# Altium PCB ESP32_PCB.PcbDoc
Units mm, origin at the board's own origin, x right, y up, seen from the top; angles counter-clockwise.
Board outline 25 x 40 mm, 4 copper layers (L1 (Sig), L2 (GND), L3 (GND), L4 (Sig)), stack 2.131 mm thick; 54 components, 44 nets, 207 pads, 84 vias.
Unrouted connection lines stored in the file: 2.
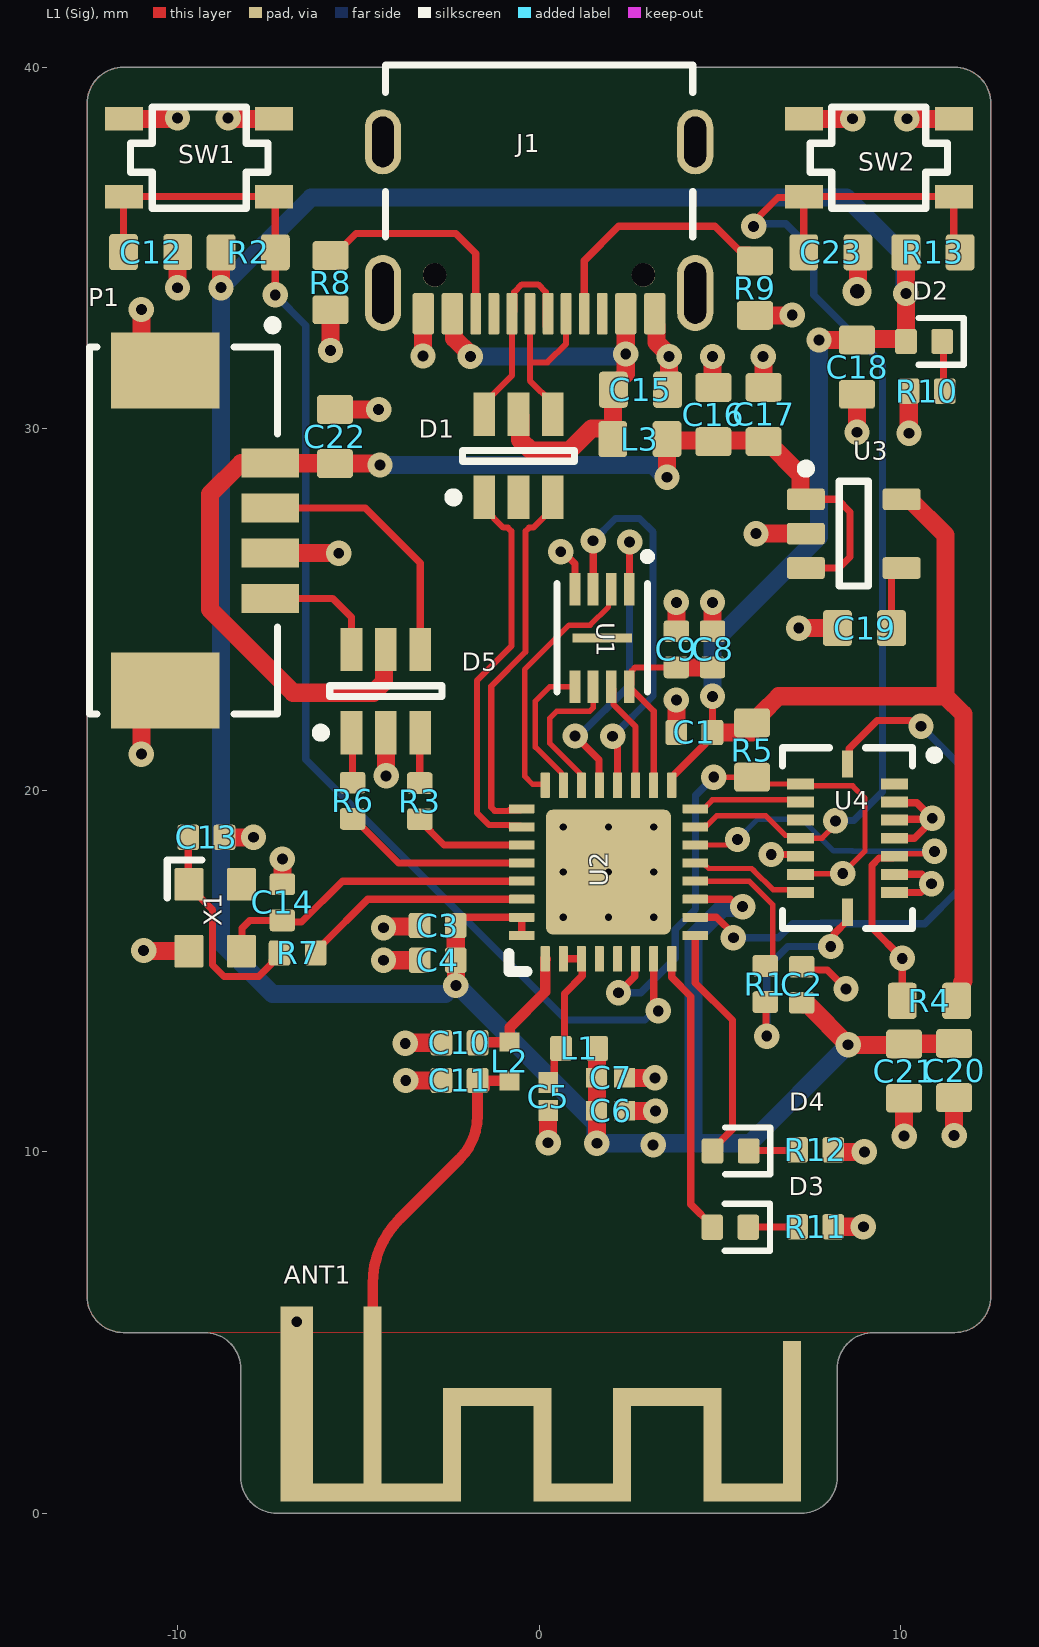
[diagram p0: L1 (Sig) view]
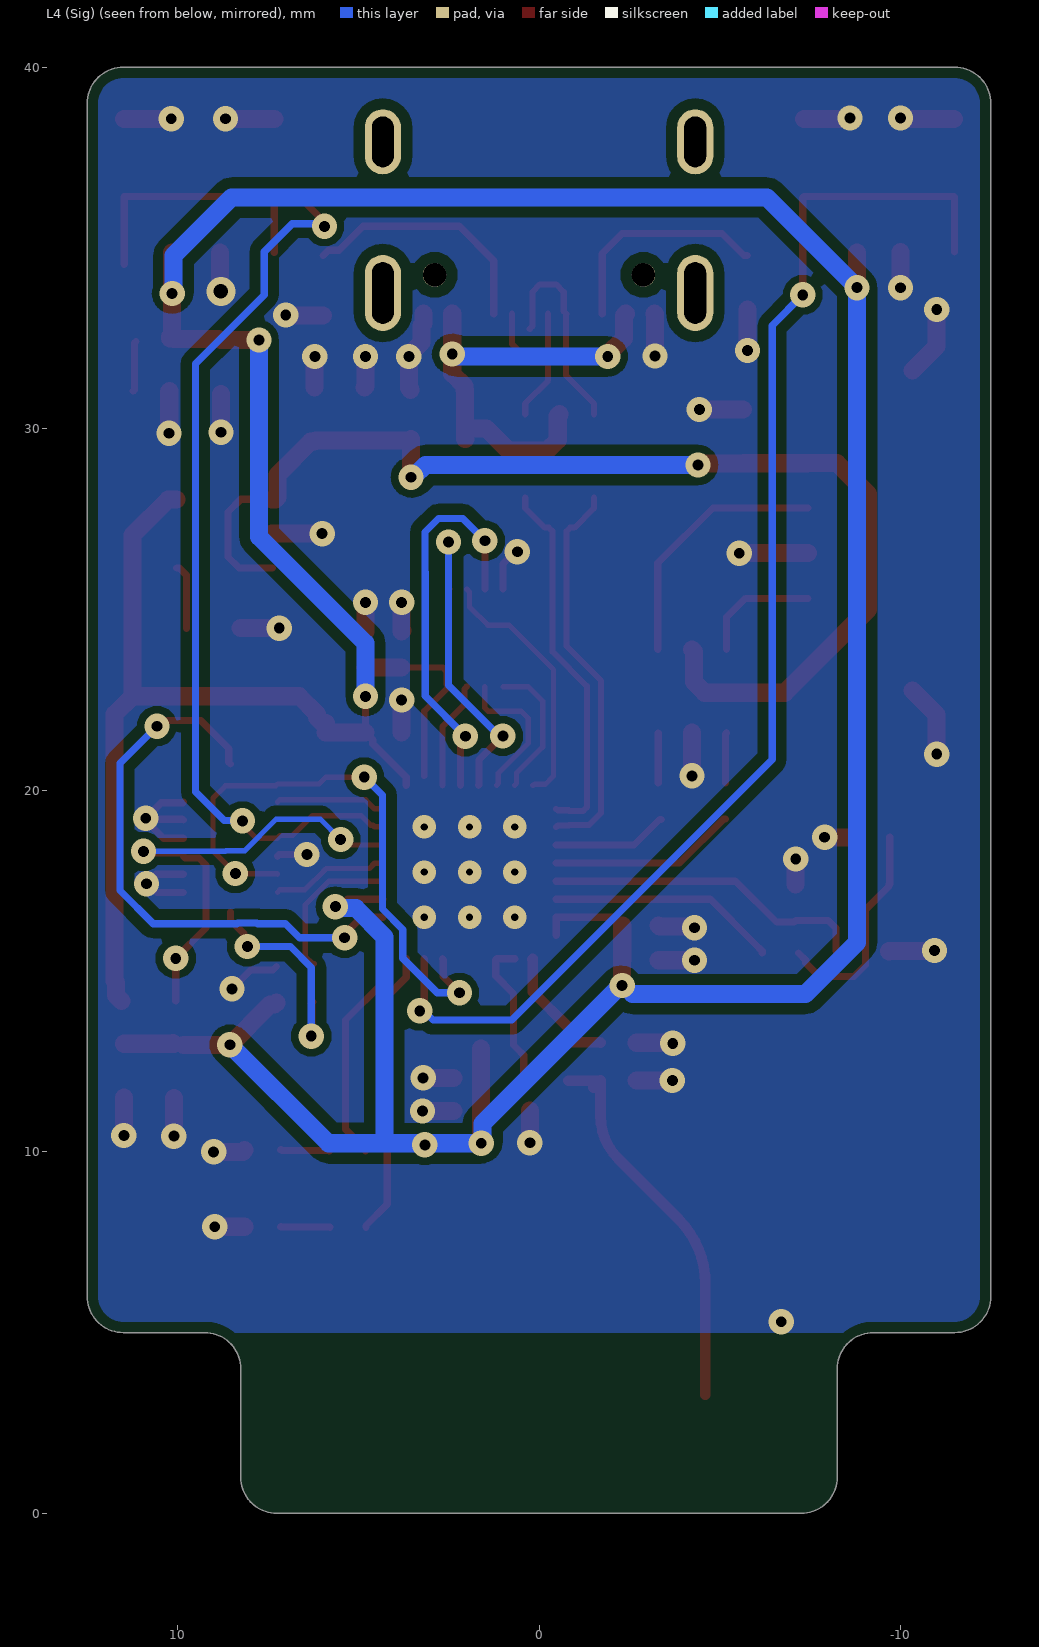
[diagram p1: L4 (Sig) view, seen from below]
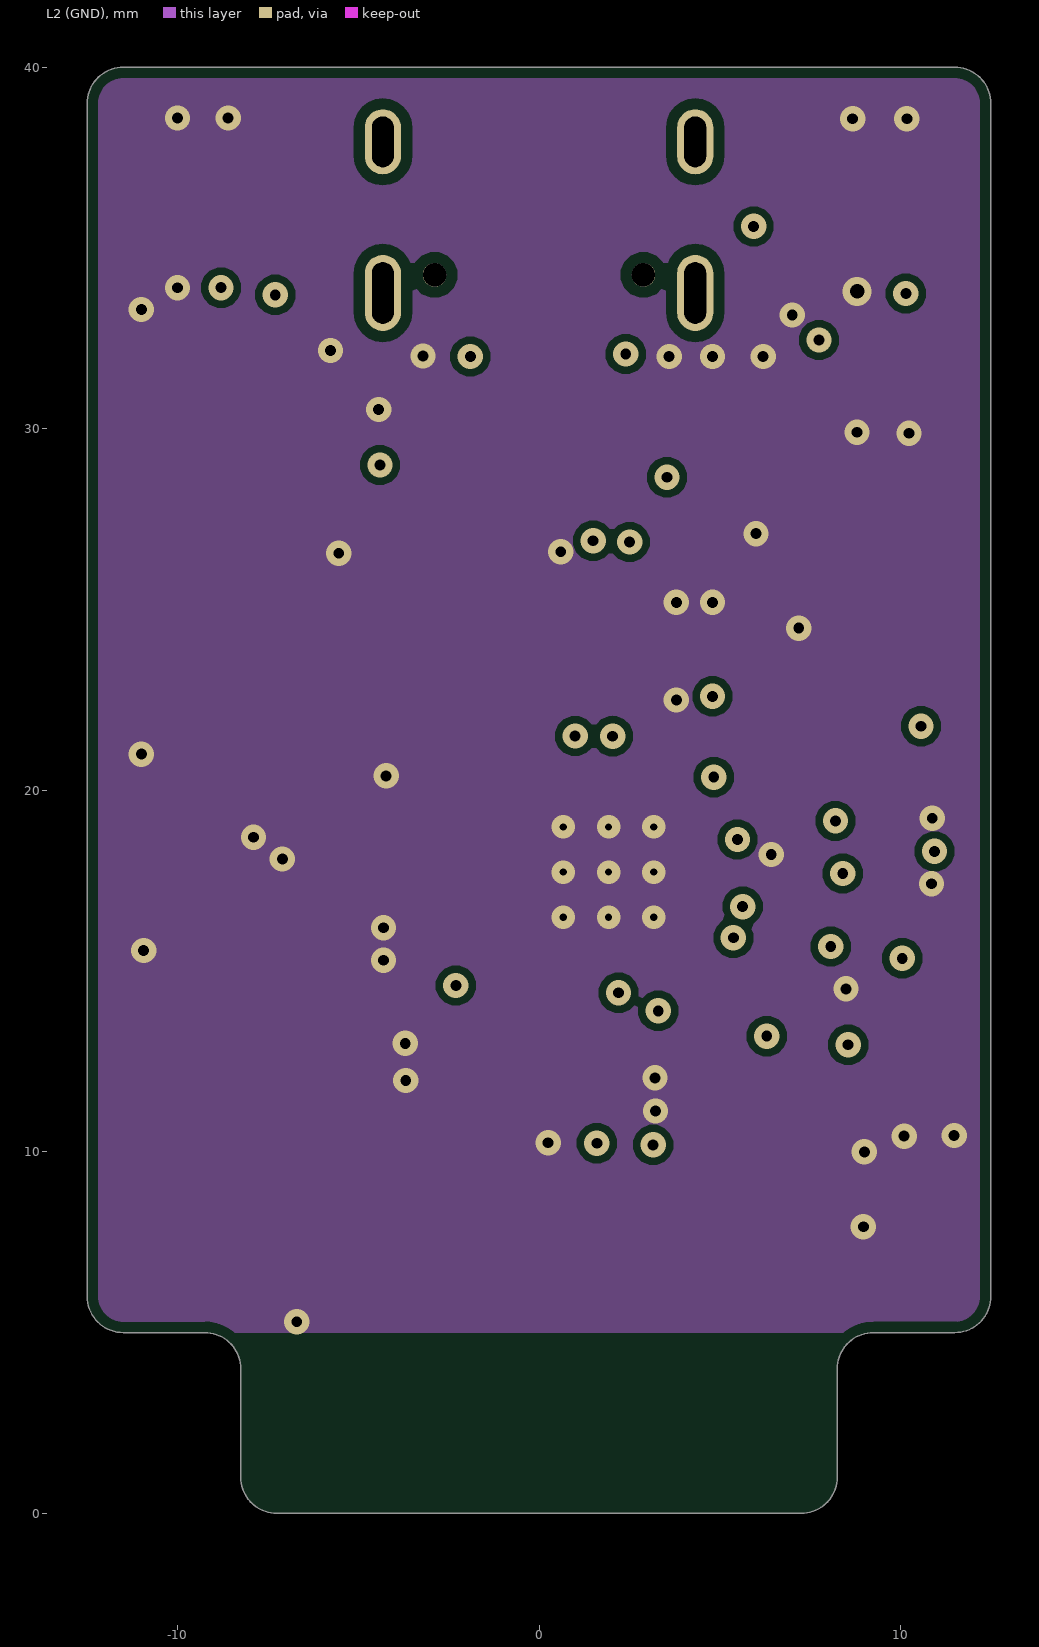
[diagram p2: L2 (GND)]
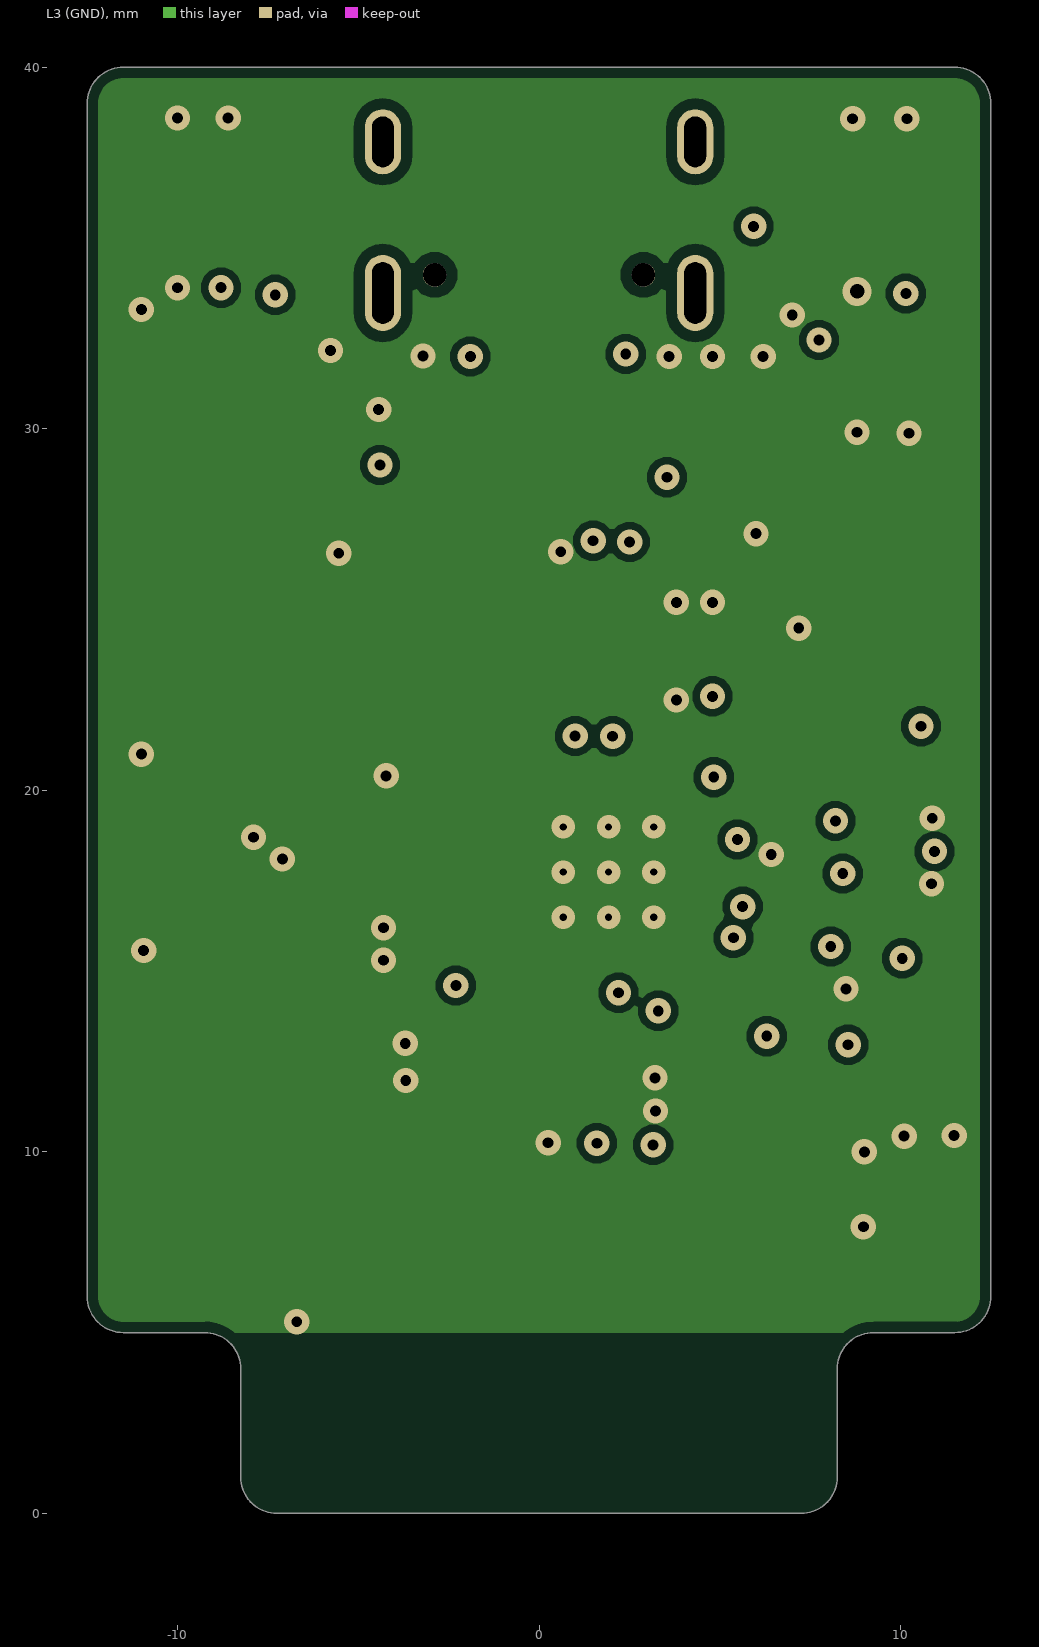
[diagram p3: L3 (GND)]
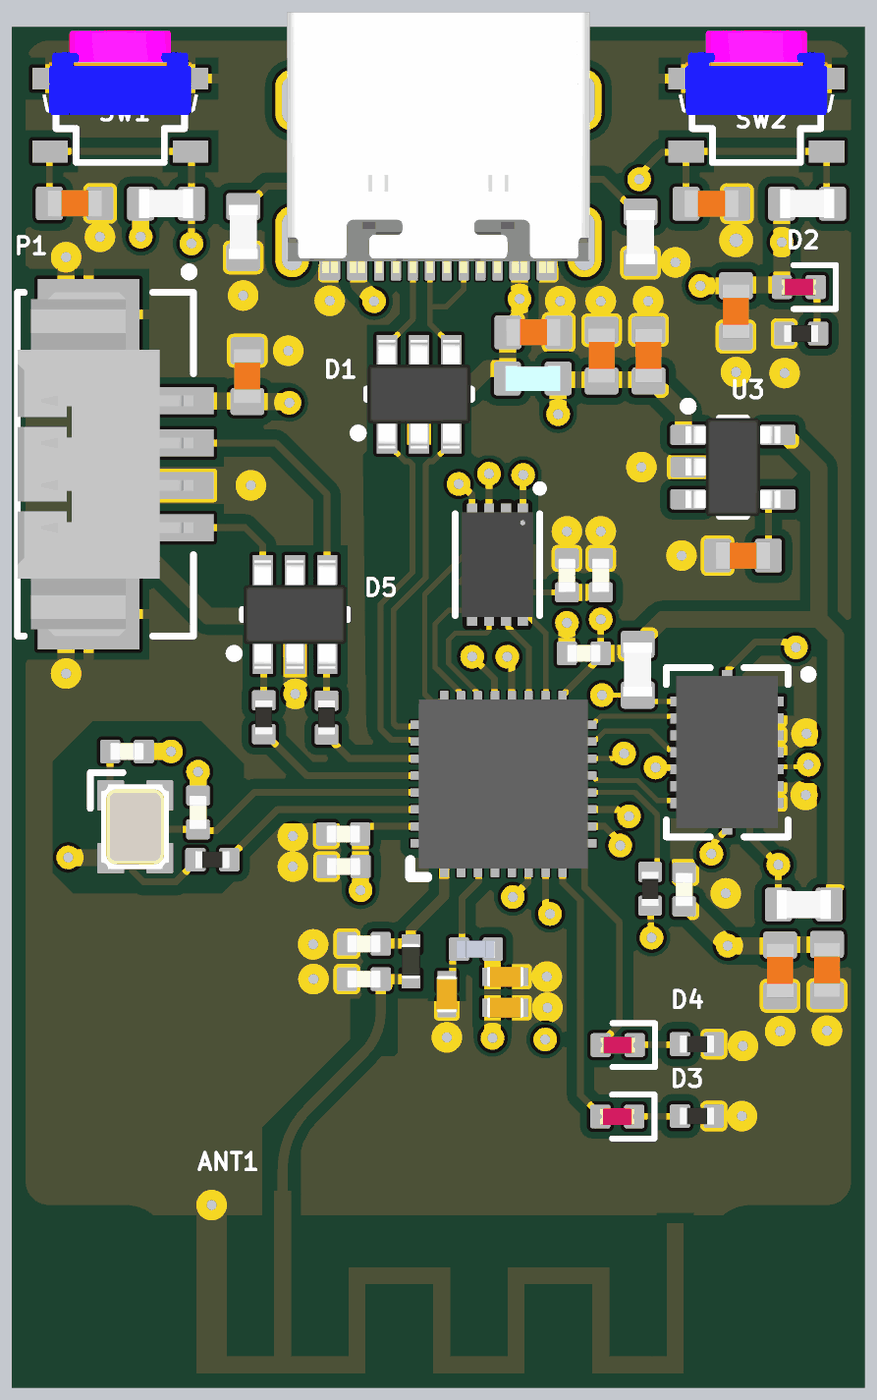
[diagram p4: 3D render of the assembled board from above, using the file's embedded part models]

## Layer stack, top to bottom
Top Solder: solder mask 0.0254, SM-001, Dk 4
L1 (Sig): signal copper 0.035
Dielectric 2: prepreg 0.2104, PP-017, Dk 4.6
L2 (GND): signal copper 0.0175
Dielectric 1: core 1.605, Core-039, Dk 4.6
L3 (GND): signal copper 0.0175
Dielectric 3: prepreg 0.2104, PP-017, Dk 4.6
L4 (Sig): signal copper 0.035
Bottom Solder: solder mask 0.0254, SM-001, Dk 4

## Board outline
-8.25,1 -8.25,4 ccw(c-9.25,4) -9.25,5 -11.5,5 cw(c-11.5,6) -12.5,6 -12.5,39 cw(c-11.5,39) -11.5,40 11.5,40 cw(c11.5,39) 12.5,39 12.5,6 cw(c11.5,6) 11.5,5 9.25,5 ccw(c9.25,4) 8.25,4 8.25,1 cw(c7.25,1) 7.25,0 -7.25,0 cw(c-7.25,1)

## Design rules (kind name [scope] priority, off if disabled: settings)
BoardOutlineClearance [All] p1: gap=0.3 ignorepadtopadclearanceinfootprint=FALSE
Clearance [All] p1: gap=0.3 ignorepadtopadclearanceinfootprint=TRUE except(0.15: Arc-Arc Arc-Track Arc-SMDPad Arc-Text Track-Track Track-SMDPad Track-Text SMDPad-SMDPad SMDPad-THPad SMDPad-Via SMDPad-Text THPad-THPad THPad-Via THPad-Text Via-Text Fill-Text Poly-Text Region-Text Text-Text; 0.2: Arc-Via Track-Via Via-Via Via-Fill Via-Poly Via-Region; 0.254: Arc-Hole Track-Hole SMDPad-Hole THPad-Hole Via-Hole Fill-Hole Poly-Hole Region-Hole Text-Hole; 0.33: Arc-THPad Track-THPad)
DiffPairsRouting [All] p1: maxlimit=0.254 minlimit=0.22 mostfreqgap=0.254 toplayer_maxgap=0.22 toplayer_prefgap=0.22 toplayer_minwidth=0.17 toplayer_maxwidth=0.17 toplayer_prefwidth=0.17 bottomlayer_maxgap=0.22 bottomlayer_prefgap=0.22 bottomlayer_minwidth=0.17 bottomlayer_maxwidth=0.17 bottomlayer_prefwidth=0.17 impedanceprofiledriven=TRUE impedanceprofileid={09B97253-BEC1-4D6E-BB7B-3307A6F28624} impedanceprofilevalue=90.000000 maxuncoupledlength=12.7
PolygonConnect [All] p1: connectstyle=Direct reliefconductorwidth=0.254 reliefentries=4 polygonreliefangle="90 Angle" airgapwidth=0.254
RoutingVias RoutingVias_1 [InNet('GND')] p1: holewidth=0.3 width=0.7 viastyle="Through Hole" minholewidth=0.2 minwidth=0.4 maxholewidth=0.4 maxwidth=0.8
RoutingVias [All] p2: holewidth=0.3 width=0.7 viastyle="Through Hole" minholewidth=0.3 minwidth=0.7 maxholewidth=0.4 maxwidth=0.8
SolderMaskExpansion [All] p1: expansion=0.102 istentingtop=FALSE
Width [All] p1: maxlimit=1 minlimit=0.15 preferedwidth=0.2
29 further rules are at their usual default settings.

## Classes and differential pairs
differential pair USB_D: +USB_D_P -USB_D_N
differential pair MCU_USB_D: +MCU_USB_D_P -MCU_USB_D_N

## Components (designator, comment, footprint, x,y, rotation, side; value= is the part's Value field where it differs from the comment)
ANT1 "ANT_IFA_USB_2_4GHZ_50R" ANT_IFA_USB_2_4GHZ_50R -6.702,5.477 r0 top
C1 "10u" CAP_0402 4.3,21.6 r0 top
C2 "100n" CAP_0402 7.265,14.623 r270 top
C3 "100n" CAP_0402 -2.806,16.261 r0 top
C4 "100n" CAP_0402 -2.8,15.3 r0 top
C5 "Capacitor 0.1 uF +/- 5% 16 V 0402" CAPC1005X56X25LL10T15 0.252,11.53 r270 top value=100nF
C6 "Capacitor 0.1 uF +/- 5% 16 V 0402" CAPC1005X56X25LL10T15 1.98,11.13 r0 top value=100nF
C7 "10u" CAPC1005X56X25LL10T15 1.979,12.047 r0 top value=100nF
C8 "10u" CAP_0402 4.8,23.9 r270 top
C9 "100n" CAP_0402 3.8,23.9 r270 top
C10 "3p3" CAP_0402 -2.2,13.017 r0 top
C11 "3p3" CAP_0402 -2.2,11.975 r0 top
C12 "100n" CAP_0603 -10.744,34.889 r180 top
C13 "10p" CAP_0402 -9.2,18.7 r180 top
C14 "10p" CAP_0402 -7.1,16.9 r270 top
C15 "100n" CAP_0603 2.806,31.08 r180 top
C16 "100n" CAP_0603 4.824,30.394 r270 top
C17 "10u" CAP_0603 6.214,30.398 r270 top
C18 "10u" CAP_0603 8.797,31.705 r90 top
C19 "100n" CAP_0603 9.004,24.486 r0 top
C20 "100n" CAP_0603 11.483,12.248 r90 top
C21 "100n" CAP_0603 10.1,12.232 r90 top
C22 "100n" CAP_0603 -5.644,29.786 r270 top
C23 "100n" CAP_0603 8.072,34.881 r180 top
D1 "USBLC6-2SC6" STM-SOT23-6L_V -0.569,29.253 r90 top
D2 "RED" LED_0402_RED 10.65,32.417 r0 top
D3 "RED" LED_0402_RED 5.288,7.915 r0 top
D4 "RED" LED_0402_RED 5.3,10.025 r0 top
D5 "USBLC6-2SC6" STM-SOT23-6L_V -4.237,22.744 r90 top
J1 "USB4105-GF-A-060" USB4105-GF-A-060 0,35.56 r180 top locked
L1 "2nH" IND_0402 1.11,12.859 r0 top
L2 "ELJ-RF2N2DFB" IND1005X55X20VL5T10 -0.813,12.502 r270 top value=2.2µH
L3 "2n2" IND_0603 2.79,29.716 r0 top
P1 "53261-0471" MOLEX-53261-0471_V -8.887,27.184 r270 top
R1 "22R" RES_0402 6.258,14.642 r90 top
R2 "5k1" RES_0603 -8.045,34.881 r180 top
R3 "470R" RES_0402 -3.3,19.7 r270 top
R4 "5k1" RES_0603 10.798,14.178 r0 top
R5 "5k1" RES_0603 5.893,21.115 r90 top
R6 "470R" RES_0402 -5.156,19.709 r270 top
R7 "22R" RES_0402 -6.676,15.502 r180 top
R8 "5k1" RES_0603 -5.768,34.043 r90 top
R9 "5k1" RES_0603 5.973,33.89 r90 top
R10 "1k" RES_0402 10.724,31.042 r0 top
R11 "1k" RES_0402 7.642,7.928 r180 top
R12 "1k" RES_0402 7.642,10.055 r180 top
R13 "5k1" RES_0603 10.898,34.881 r180 top
SW1 "SKRPANE010" SKRPANE010 -9.4,37.5 r0 top
SW2 "SKRPANE010" SKRPANE010 9.4,37.5 r0 top
U1 "W25Q16JVUXIQ" USON-8-2X3MM 1.747,24.217 r270 top
U2 "ESP32-C3" QFN32-5X5 1.922,17.738 r90 top
U3 "SPX3819M5-L-3-3/TR" SOT-23-5 8.706,27.099 r0 top
U4 "BMI055" BMI088 8.534,18.676 r270 top
X1 "40MHZ" XTAL_2520 -8.958,16.474 r270 top

## Footprints (in the part's own frame and the unit in brackets; to place one, negate y for a bottom-side part, rotate by r counter-clockwise, add the part's x,y. Pads: shape width x height; smd on the part's side, far side on the other; paste and mask are expansions set on the pad)
ANT_IFA_USB_2_4GHZ_50R [mm]
  rect 5x0.5 smd paste-2539.97 mask+0.102: 1(2.05,-4.9)
  rect 0.5x4.9 smd paste-2539.97 mask+0.102: 1(2.1,-2.2)
  rect 0.5x2.64 smd paste-2539.97 mask+0.102: 1(4.3,-3.33) 1(6.8,-3.33) 1(9,-3.33) 1(11.5,-3.33)
  rect 2x0.5 smd paste-2539.97 mask+0.102: 1(5.55,-2.26) 1(10.25,-2.26)
  rect 2.7x0.5 smd paste-2539.97 mask+0.102: 1(7.9,-4.9) 1(12.6,-4.9)
  rect 0.5x3.94 smd paste-2539.97 mask+0.102: 1(13.7,-2.68)
  rect 0.9x4.9 smd paste-2539.97 mask+0.102: 2(0,-2.2)
BMI088 [mm]
  rect 0.3x0.75 smd: 1(-1.5,1.3) 2(-1,1.3) 3(-0.5,1.3) 4(0,1.3) 5(0.5,1.3) 6(1,1.3) 7(1.5,1.3) 9(1.5,-1.3) 10(1,-1.3) 11(0.5,-1.3) 12(0,-1.3) 13(-0.5,-1.3) 14(-1,-1.3) 15(-1.5,-1.3)
  rect 0.75x0.3 smd: 8(2.05,0) 16(-2.05,0)
  silkscreen extent -2.5,-1.8 2.5,2.51, body extent -2.25,-1.5 2.25,1.5, height 1.01
CAP_0402 [mm]
  rrect25% 0.6x0.7 smd: 1(-0.5,0) 2(0.5,0)
  body extent -0.5,-0.26 0.5,0.26, height 0.37
CAP_0603 [mm]
  rrect25% 0.8x1 smd: 1(-0.75,0) 2(0.75,0)
  body extent -0.8,-0.4 0.8,0.4, height 0.51
CAPC1005X56X25LL10T15 [mm] "Chip Capacitor, 2-Leads, Body 1.10x0.60mm, IPC High Density"
  rect 0.58x0.54 smd: 1(-0.39,0) 2(0.39,0)
  body extent -0.55,-0.3 0.55,0.3, height 0.56
IND1005X55X20VL5T10 [mm] "Chip Inductor, 2-Leads, Body 1.05x0.55mm"
  rect 0.525x0.55 smd: 1(-0.537,0) 2(0.537,0)
  body extent -0.53,-0.28 0.53,0.28, height 0.55
IND_0402 [mm]
  rrect25% 0.6x0.7 smd: 1(-0.5,0) 2(0.5,0)
  body extent -0.56,-0.26 0.56,0.26, height 0.67
IND_0603 [mm]
  rrect25% 0.8x1 smd: 1(-0.75,0) 2(0.75,0)
  body extent -0.81,-0.37 0.81,0.37, height 0.87
LED_0402_RED [mm]
  rrect25% 0.6x0.7 smd: A(-0.5,0) K(0.5,0)
  silkscreen extent -0.15,-0.65 1.1,0.65, body extent -0.51,-0.25 0.51,0.25, height 0.45
MOLEX-53261-0471_V [mm] "SMD, 4-Leads, Body 10.15x5.2mm, Pitch 1.25mm"
  rect 0.8x1.6 smd: 1(-1.875,1.45) 2(-0.625,1.45) 3(0.625,1.45) 4(1.875,1.45)
  rect 2.1x3 smd: MP1(-4.425,-1.45) MP2(4.425,-1.45)
  silkscreen extent -5.81,-3.55 5.08,1.65, body extent -5.08,-3.55 5.07,1.65, height 3.4
QFN32-5X5 [mm]
  rrect10% 0.7x0.25 smd mask+0.05: 1(-2.4,1.75) 2(-2.4,1.25) 3(-2.4,0.75) 4(-2.4,0.25) 5(-2.4,-0.25) 6(-2.4,-0.75) 7(-2.4,-1.25) 8(-2.4,-1.75) 17(2.4,-1.75) 18(2.4,-1.25) 19(2.4,-0.75) 20(2.4,-0.25) 21(2.4,0.25) 22(2.4,0.75) 23(2.4,1.25) 24(2.4,1.75)
  rrect10% 0.25x0.7 smd mask+0.05: 9(-1.75,-2.4) 10(-1.25,-2.4) 11(-0.75,-2.4) 12(-0.25,-2.4) 13(0.25,-2.4) 14(0.75,-2.4) 15(1.25,-2.4) 16(1.75,-2.4) 25(1.75,2.4) 26(1.25,2.4) 27(0.75,2.4) 28(0.25,2.4) 29(-0.25,2.4) 30(-0.75,2.4) 31(-1.25,2.4) 32(-1.75,2.4)
  rrect10% 3.45x3.45 smd mask+0.07: 33(0,0)
  silkscreen extent -2.75,2.25 -2.25,2.75, body extent -2.5,-2.5 2.5,2.5, height 0.85
RES_0402 [mm]
  rrect25% 0.6x0.7 smd: 1(-0.5,0) 2(0.5,0)
  body extent -0.5,-0.25 0.5,0.25, height 0.3
RES_0603 [mm]
  rrect25% 0.8x1 smd: 1(-0.75,0) 2(0.75,0)
  body extent -0.8,-0.43 0.8,0.43, height 0.52
SKRPANE010 [mm]
  rect 1.05x0.65 smd: 12(-2.075,1.075) 12(2.075,1.075) 34(-2.075,-1.075) 34(2.075,-1.075)
  silkscreen extent -1.9,-1.4 1.9,1.4, body extent -2.3,-1.6 2.3,1.6, height 2.51
SOT-23-5 [mm] "SOT23, 5-Leads, Body 2,90x2,80mm, Pitch 0,95mm, IPC Medium Density"
  rrect25% 1.05x0.6 smd: 1(-1.325,0.95) 2(-1.325,0) 3(-1.325,-0.95) 4(1.325,-0.95) 5(1.325,0.95)
  silkscreen extent -1.45,-1.45 0.4,1.92, body extent -1.4,-1.45 1.4,1.45, height 1.45
STM-SOT23-6L_V [mm] "SOT23, 6-Leads, Body 3.05x1.75mm, Pitch 0.95mm"
  rect 1.2x0.6 smd: 1(-1.15,0.95) 2(-1.15,0) 3(-1.15,-0.95) 4(1.15,-0.95) 5(1.15,0) 6(1.15,0.95)
  silkscreen extent -1.27,-1.55 0.15,1.92, body extent -1.6,-1.53 1.6,1.53, height 1.45
USB4105-GF-A-060 [mm]
  rrect25% 0.6x1.15 smd mask+0.05: A1B12(-3.2,2.378) A4B9(-2.4,2.378) B1A12(3.2,2.378) B4A9(2.4,2.378)
  rrect25% 0.3x1.15 smd mask+0.05: A5(-1.25,2.378) A6(-0.25,2.378) A7(0.25,2.378) A8(1.25,2.378) B5(1.75,2.378) B6(0.75,2.378) B7(-0.75,2.378) B8(-1.75,2.378)
  round 0.65 hole 0.65 unplated mask+0.05: MH(-2.89,1.303) MH(2.89,1.303)
  oval 1x1.8 hole 0.6 slot 1.4 at 90 deg: SH(-4.32,-2.377) SH(4.32,-2.377)
  oval 1x2.1 hole 0.6 slot 1.7 at 90 deg: SH(-4.32,1.803) SH(4.32,1.803)
  silkscreen extent -4.25,-4.5 4.25,0.25, body extent -4.47,-4.97 4.47,2.73, height 3.27
USON-8-2X3MM [mm]
  rect 0.9x0.3 smd mask+0.13: 1(-1.35,0.75) 2(-1.35,0.25) 3(-1.35,-0.25) 4(-1.35,-0.75) 5(1.35,-0.75) 6(1.35,-0.25) 7(1.35,0.25) 8(1.35,0.75)
  rect 0.25x1.65 smd paste-0.1: 9(0,0)
  silkscreen extent -2.35,-1.25 1.5,1.35, body extent -1.55,-1.05 1.55,1.05, height 0.61
XTAL_2520 [mm]
  rrect10% 0.9x0.8 smd mask+0: 1(-0.925,-0.725) 2(0.925,-0.725) 3(0.925,0.725) 4(-0.925,0.725)
  silkscreen extent -1.6,-1.33 -0.54,-0.36, body extent -1.25,-1 1.25,1, height 0.8

## Part data
ANT1: library part CMP-028-000142-1, "Inverted F 2.4GHz ISM PCB Antenna 50 Ohm", ComponentLink1Description=Datasheet, ComponentLink1URL=https://www.ti.com/lit/an/swra117d/swra117d.pdf, Design Item ID=ANT_IFA_USB_2_4GHZ_50R, Source=Schematic-Lib-PhilsLab.SchLib
C1 C2 C3 C4 C8 C9: library part CAP_0402_50V, "Capacitor SMD 0402 50V", LCSC=C1525, Manufacturer=Samsung, Manufacturer Part Number=CL05B104KO5NNNC
C5 C6 C7: library part CMP-001-00001-6, "Chip Capacitor, 0.1 uF, +/- 5%, 16 V, 0402 (1005 Metric)", Capacitor Type=Ceramic, Case/Package=0402, Max Operating Temperature=125°C, Min Operating Temperature=-55°C, Tolerance=5%, Voltage Rating=16V, Mounting Technology=SM, Pins=2, RoHS Compliant=True
C10 C11 C13 C14: library part CAP_0402, "Capacitor SMD 0402"
C12 C23: library part CAP_0603, "Capacitor SMD 0603"
C15 C16 C17 C18 C19 C20 C21 C22: library part CMP-001-00087-1, "Capacitor SMD 0603", Design Item ID=CAP_0603, Source=Schematic-Lib-PhilsLab.SchLib
D1 D5: library part CMP-2000-05378-1, "Very low capacitance ESD protection, 3.5 pF, -40 to 125 degC, 6-Pin SOT23, RoHS, Tape and Reel", Capacitance Value=3.5pF, Clamping Voltage=17V, LCSC=C7519, Leakage Current=0.15uA, Manufacturer=STMicroelectronics, Operating Temp Range=-40Cto125C, Operating Temperature Classification=Automotive, Operating Temperature Max Deg. C=125C, Operating Temperature Min Deg. C=-40C, Package / Case=SOT-23, Package Description="6-Pin Small Outline Transistor, Body 2.925 x 1.625 mm, Pitch 0.95 mm", Package Reference=SOT23-6L, Peak Pulse Current=5A, Reverse Breakdown Voltage=6V, Reverse Stand-off Voltage=5V, Test Current (It)=1mA, Clamping Voltage (Max)=17V, Configuration=Dual, Datasheet URL=http://www.st.com/st-web-ui/static/active/en/resource/technical/document/datasheet/CD00050750.pdf, Datasheet Version="Rev. 5, 10/2011", Direction Type=Uni-Directional, Leakage Current (Max)=0.15uA, Manufacturer URL=http://www.st.com/, Mounting=SurfaceMount, Mounting Style=SurfaceMount, Number of Elements=1, Packaging=TapeandReel, Pin Count=6, Polarity=Uni-Directional, Product Depth (mm)=1.75mm, Product Height (mm)=1.3mm, Product Length (mm)=3.05mm, Rad Hardened=No, Suppressor Type=DiodeArrays, Working Voltage=5V, Working Voltage (Max)=5V
D2 D3 D4: library part LED_0402_RED, "LED 0402 RED SMD"
J1: library part CMP-002-00129-1, "USB Connector Type C SMT 12 Pin", Manufacturer=GCT, Design Item ID=USB4105-GF-A-060, Distributor Link=https://eu.mouser.com/ProductDetail/GCT/USB4105-GF-A-060?qs=QNEnbhJQKvY2mocwNJzgfA%3D%3D, Manufacturer Part Number=USB4105-GF-A-060, Source=Schematic-Lib-PhilsLab.SchLib
L1: library part IND_0402, "Inductor SMD 0402"
L2: library part CMP-006-00006-6, "Chip Inductor, 2.2 nH, +/- 0.3 nH, 400 mA, -40 to 85 degC, 0402 (1005 Metric), RoHS, Tape and Reel", Case/Package=0402, Current Rating=400mA, Manufacturer=Panasonic, Max Operating Temperature=85°C, Min Operating Temperature=-20°C, Package Description="2-Pin Surface Mount Device, Body 1 x 0.5 mm", Package Quantity=10000, Tolerance=5%, Core Material=Ceramic, Datasheet URL=http://www.bourns.com/docs/Product-Datasheets/cm322522.pdf, Datasheet Version=Sep-12, Mounting Technology=SM, Package Reference=0402, Packaging=TapeandReel, Q Factor=8, RoHS Compliant=True, Shielding=Unshielded
L3: library part CMP-006-00026-1, "Inductor SMD 0603", Design Item ID=IND_0603, Source=Schematic-Lib-PhilsLab.SchLib
P1: library part CMP-2000-05238-1, "Male Header, Pitch 1.25 mm, 1 x 4 Position, Height 3.4 mm, -40 to 85 degC, RoHS, Tape and Reel", Current Rating=1A, Manufacturer=Molex, Package Description="1.25mm Pitch PicoBlade(TM) Header, Surface Mount, Right Angle, Lead-Free, 4 Circuits", Voltage Rating=125V, Brand=Molex, Contact Material=PhosphorBronze, Contact Plating=Tin, Datasheet URL=http://www.molex.com/pdm_docs/sd/532610471_sd.pdf, Datasheet Version="Rev. G, 01/2012", Factory Pack Quantity=1000, Housing Material=Thermoplastic, Manufacturer URL=http://www.molex.com/, Mounting Angle=Right, Mounting Style=SMD/SMT, Number of Positions=4, Number of Positions / Contacts=4, Number of Rows=1, Packaging=Reel, Pitch=1.25mm, Product Category=Headers&WireHousings, Product Type=Headers, RoHS=Details, Series=53261, Termination Style=SMD, Tradename=PicoBlade, Type=Shrouded
R1 R3 R6 R7: library part CMP-009-00182-1, "Resistor SMD 0402", Design Item ID=RES_0402, Source=Schematic-Lib-PhilsLab.SchLib
R2 R4 R5 R8 R9 R13: library part CMP-009-00183-1, "Resistor SMD 0603", Design Item ID=RES_0603, Source=Schematic-Lib-PhilsLab.SchLib
R10 R11 R12: library part RES_0402, "Resistor SMD 0402"
SW1: library part CMP-011-00019-1, "Tactile Switch SMD SPST", Manufacturer="Alps Alpine", Design Item ID=SKRPANE010, Manufacturer Part Number=SKRPANE010, Source=Schematic-Lib-PhilsLab.SchLib
SW2: "Tactile Switch SMD SPST", LCSC=C470426, Manufacturer="Alps Alpine", Manufacturer Part Number=SKRPANE010
U1: library part CMP-031-00020-1, "16M-BIT SERIAL FLASH MEMORY WITH DUAL/QUAD SPI USON-8", LCSC=C2843335, Manufacturer=Winbond, Design Item ID=W25Q16JVUXIQ, Manufacturer Part Number=W25Q16JVUXIQ, Source=Schematic-Lib-PhilsLab.SchLib
U2: library part CMP-028-000024-1, "Ultra­Low­Power SoC with RISC­V Single­Core CPU Supporting IEEE 802.11b/g/n (2.4 GHz Wi­Fi) and Bluetooth® 5 (LE)", LCSC=C2838500, Manufacturer=Espressif, Design Item ID=ESP32-C3, Manufacturer Part Number=ESP32-C3, Source=Schematic-Lib-PhilsLab.SchLib
U3: library part CMP-028-000131-1, "500mA +3.3V Low-Noise LDO Voltage Regulator", Manufacturer=MaxLinear, Design Item ID=SPX3819M5-L-3-3/TR, Manufacturer Part Number=SPX3819M5-L-3-3/TR, Source=Schematic-Lib-PhilsLab.SchLib
U4: "Inertial Measurement Unit IMU 6-Axis LGA", LCSC=C189620, Manufacturer=Bosch, Manufacturer Part Number=BMI055
X1: library part XTAL_2520, "Crystal SMD 2520"

## Via types
v1: diameter 0.7, hole 0.3, L1 (Sig) to L4 (Sig), 74 vias
v2: diameter 0.65, hole 0.2, L1 (Sig) to L4 (Sig), tented both sides, 9 vias
v3: diameter 0.8, hole 0.4, L1 (Sig) to L4 (Sig), 1 vias

## Nets (pads, with @x,y where several pads share a name; then routed paths per layer and width w, separated by ;. In a path a pad name is that pad's centre, name@x,y a point inside that pad or via, vN(x,y) a via of type N, cw(c..) or ccw(c..) an arc to the next point about the centre after c; other vN are vias at no path point)
+3V3: C1.2 C2.2 C3.2 C4.2 C6.1 C7.1 C18.2 C20.2 C21.2 D2.A L1.2 R2.2 R4.2 R5.2 R13.2 U2.11 U2.17 U2.31 U2.32 U3.5 | length 121.5
  L1 (Sig) w0.2: C3.2 -2.306,16.288 -2.106,16.488 U2.31 U2.32 ; U2.17 3.672,20.363 4.6,21.291 4.6,21.4 C1.2 v1(4.8,22.6) ; U2.11 5.293,16.988
  L1 (Sig) w0.5: v1(-8.795,33.905) R2.2 ; C3.2 -2.303,16.258 -2.303,15.303 C4.2 v1(-2.3,14.6) ; v1(1.6,10.238) 1.6,11.12 C6.1 1.6,11.14 1.6,12.849 L1.2 ; C1.2 4.804,21.596 R5.2@5.899,21.596 ; R5.2 5.993,21.865 6.143,22.015 6.143,22.115 6.632,22.603 11.246,22.603 ; C2.2 7.315,14.073 7.438,14.073 v1(8.551,12.96) C21.2@9.835,12.96 ; v1(7.745,32.455) C18.2 ; C18.2@8.866,32.484 D2.A@10.1,32.484 ; U3.5 10.256,28.049 11.246,27.059 11.246,22.6 11.741,22.104 11.741,14.721 11.698,14.677 11.698,14.328 R4.2 ; C21.2 C21.2@10.108,12.99 ; C21.2@10.127,13.009 C21.2@10.108,12.99 ; R13.2 v1(10.148,33.742) 10.148,32.602 10.2,32.55 D2.A@10.2,32.5 ; C20.2 11.475,12.99 C21.2@10.108,12.99
  L4 (Sig) w0.5: -2.586,14.368 -7.368,14.368 -8.795,15.795 v1(-8.795,33.905) -6.301,36.399 8.501,36.399 10.109,34.791 10.109,33.78 v1(10.148,33.742) ; v1@-2.256,14.6 1.562,10.782 1.562,10.276 v1(1.6,10.238) 4.271,10.238 ; v1(4.8,22.6) 4.8,24.069 7.745,27.013 v1(7.745,32.455) ; v1(5.633,16.783) 5.594,16.745 5.07,16.745 4.271,15.947 4.271,10.238 ; v1(8.551,12.96) 5.829,10.238 4.271,10.238
  other v1: 3.157,10.192
+VBUS: C15.2 D1.5 J1.A4B9 J1.B4A9 L3.1 | length 13
  L1 (Sig) w0.5: J1.B4A9 -2.35,33.132 -2.35,32.504 -1.9,32.054 v1(-1.9,32) ; D1.5 -0.519,30.353 -0.519,29.696 -0.226,29.403 0.847,29.403 1.454,30.01 L3.1@2.048,30.01 ; L3.1 2.048,29.724 L3.1@2.048,30.01 ; J1.A4B9 v1(2.4,32.068) 2.4,31.524 2.056,31.18 C15.2 2.048,31.072 L3.1@2.048,30.01
  L4 (Sig) w0.5: v1(-1.9,32) 2.278,32 2.346,32.068 v1(2.4,32.068)
+VBUS_FILT: C16.2 C17.2 C22.2 D5.5 L3.2 P1.1 U3.1 U3.3 | length 33.1
  L1 (Sig) w0.2: U3.3 8.293,26.149 8.6,26.456 8.6,27.7 8.251,28.049 U3.1
  L1 (Sig) w0.5: v1(-4.4,29) -4.436,29.036 C22.2 -5.656,29.048 -7.425,29.048 P1.1 -8.237,29.059 -9.1,28.196 -9.1,25 -6.8,22.7 -4.58,22.7 -4.287,22.993 -4.287,23.844 D5.5 ; v1(3.54,28.66) L3.2 3.573,29.682 6.18,29.682 C17.2 6.314,29.648 7.237,28.725 7.237,28.099 7.287,28.049 U3.1
  L4 (Sig) w0.5: v1(-4.4,29) 3.146,29 3.486,28.66 v1(3.54,28.66)
+VCC_SPI: C8.2 C9.2 U1.8 U2.18 | length 5.5
  L1 (Sig) w0.17: U2.18@3.174,20.397 3.174,22.191 U1.8 2.562,22.932 2.562,23.3 2.662,23.4 C9.2
  L1 (Sig) w0.5: C9.2 C8.2
ANT_RF: ANT1.1 C11.2 L2.2 | length 10.9
  L1 (Sig) w0.295: ANT1.1@-4.602,3.277 -4.602,6.346 cw(c-2.062,6.346) -3.858,8.142 -2.2,9.8 ccw(c-3.407,11.007) -1.7,11.007 C11.2 C11.2@-1.695,11.97 ; C11.2@-1.5,11.775 C11.2@-1.695,11.97 ; L2.2 -0.818,11.97 C11.2@-1.695,11.97
CHIP_EN: C12.2 R2.1 SW1.34 U2.7 | length 36
  L1 (Sig) w0.2: C12.2 -11.494,36.406 -11.475,36.425 -7.325,36.425 -7.295,36.395 R2.1 v1(-7.295,33.705) ; U2.7 3.172,14.163 3.3,14.035 v1(3.3,13.9)
  L4 (Sig) w0.2: v1(-7.295,33.705) -6.45,32.86 -6.45,20.85 0.755,13.645 2.933,13.645 3.188,13.9 v1(3.3,13.9)
FSPI_CLK: R1.1 U4.8 | length 6
  L1 (Sig) w0.2: R1.1 6.3,14.101 6.279,14.08 6.279,13.221 v1(6.3,13.2) ; v1(8.068,15.678) 8.164,15.773 8.164,16.03 8.534,16.401 U4.8
  L4 (Sig) w0.2: v1(6.3,13.2) 6.3,15.1 6.878,15.678 v1(8.068,15.678)
FSPI_D: U2.13 U4.9 | length 3.2
  L1 (Sig) w0.15: U2.13 4.547,17.988 4.597,17.938 4.597,17.936 4.695,17.838 5.882,17.838 5.931,17.789 5.937,17.789 6.475,17.251 7.159,17.251 U4.9
FSPI_NCS: U2.16 U4.14 | length 3
  L1 (Sig) w0.15: U2.16 4.547,19.488 4.796,19.737 7.173,19.737 U4.14
FSPI_NCS2: R4.1 U2.14 U4.5 | length 13.5
  L1 (Sig) w0.15: U2.14 5.188,18.488 5.339,18.639 v1(5.488,18.639) ; U4.5 9.902,18.243 10.874,18.243 v1(10.941,18.311)
  L1 (Sig) w0.2: U4.5 9.784,18.126 9.406,18.126 9.209,17.929 9.209,16.191 v1(10.048,15.352) R4.1
  L2 (GND) w0.15: v1(5.488,18.639) v1@5.639,18.639 ; v1(10.941,18.311) v1@10.989,18.311
  L4 (Sig) w0.15: v1(5.488,18.639) 6.049,19.2 7.27,19.2 8.145,18.325 8.659,18.325 8.673,18.311 v1(10.941,18.311)
FSPI_Q: R5.1 U2.6 U4.10 U4.15 | length 16.5
  L1 (Sig) w0.15: v1(4.835,20.365) R5.1 6.083,20.176 U4.15 7.28,20.13 8.287,20.13 8.291,20.126 8.674,20.126 9.018,19.782 9.018,18.318 v1(8.4,17.7) 8.388,17.688 7.246,17.688 U4.10
  L1 (Sig) w0.2: v1(2.2,14.4) 2.647,14.847 2.647,15.313 U2.6
  L4 (Sig) w0.2: v1(2.2,14.4) 2.816,14.4 3.768,15.352 3.768,16.15 4.332,16.715 4.332,19.862 v1(4.835,20.365)
GND: ANT1.2 C1.1 C2.1 C3.1 C4.1 C5.2 C6.2 C7.2 C8.1 C9.1 C10.1 C11.1 C12.1 C13.1 C14.1 C15.1 C16.1 C17.1 C18.1 C19.1 C20.1 C21.1 C22.1 C23.1 D1.2 D5.2 J1.A1B12 J1.B1A12 P1.3 P1.MP1 P1.MP2 R8.1 R9.1 R10.1 R11.1 R12.1 SW1.12 SW2.12 U1.4 U1.9 U2.33 U3.2 U4.2 U4.3 U4.4 U4.6 U4.7 U4.11 X1.2 X1.4 | length 53
  L1 (Sig) w0.2: v1(0.6,26.6) 0.668,26.6 0.997,26.271 U1.4 ; v1(6.422,18.226) 7.184,18.226 U4.11 ; C2.1 7.36,15.028 7.972,15.028 v1(8.492,14.508) ; U4.7 10.568,17.176 10.668,17.276 10.717,17.276 v1(10.856,17.415) 10.695,17.576 10.691,17.576 10.591,17.676 U4.6 ; U4.4 10.387,18.676 10.878,19.167 v1(10.878,19.226) ; U4.3 9.859,19.201 10.853,19.201 v1(10.878,19.226) ; U4.2 9.853,19.657 10.448,19.657 v1(10.878,19.226)
  L1 (Sig) w0.5: SW1.12@-11.475,38.575 -10.025,38.575 v1(-10,38.6) ; v1(-11,21) -11,22.096 P1.MP2 ; v1(-11,33.3) -11,32.273 P1.MP1 ; v1(-10.937,15.569) -10.927,15.559 -9.693,15.559 X1.2 ; v1(-10,33.9) -10,34.883 C12.1 ; C13.1 v1(-7.9,18.7) ; v1(-8.6,38.6) -8.575,38.575 SW1.12@-7.325,38.575 ; P1.3 v1(-5.541,26.559) ; C14.1 v1(-7.1,18.1) ; v1(-5.768,32.168) R8.1 ; C22.1 v1(-4.436,30.536) ; v1(-4.3,15.3) C4.1 ; v1(-4.3,16.2) -4.27,16.23 -3.336,16.23 C3.1 ; D5.2 -4.237,20.437 -4.23,20.43 v1(-4.23,20.4) ; v1(-3.7,13) -3.683,13.017 C10.1 ; v1(-3.688,11.975) C11.1 ; v1(-3.208,32.013) -3.204,32.018 -3.204,33.178 J1.B1A12 ; v1(0.252,10.253) C5.2 ; C7.2 v1(3.206,12.047) ; C6.2 v1(3.225,11.13) ; J1.A1B12 3.2,32.907 3.25,32.857 3.25,32.393 3.6,32.043 3.6,31.124 C15.1 ; C9.1@3.777,24.423 C9.1 v1(3.8,25.2) ; C1.1 v1(3.8,22.5) ; C8.1 v1(4.8,25.2) ; v1(4.8,32) 4.8,31.168 C16.1 ; R9.1 6.997,33.14 v1(7.005,33.147) ; v1(6,27.1) U3.2 ; v1(6.2,32) 6.214,31.986 C17.1 ; v1(7.186,24.486) C19.1 ; SW2.12@7.325,38.575 v1(8.675,38.575) ; R11.1 v1(8.972,7.928) ; R12.1 8.142,10.05 8.192,10 v1(9,10) ; v1(8.797,29.905) C18.1 ; v3(8.8,33.8) 8.822,33.822 C23.1 ; v1(10.1,10.435) C21.1 ; v1(10.175,38.575) SW2.12@11.475,38.575 ; R10.1 10.228,31.038 10.228,29.881 v1(10.233,29.876) ; v1(11.483,10.452) C20.1
  L2 (GND) w0.5: v1(-4.23,20.4) v1@-4.2,20.37
  other v1: -6.7,5.3 3.6,32
  other v2: 0.672,16.488 1.922,16.488 3.172,16.488 0.672,17.738 1.922,17.738 3.172,17.738 0.672,18.988 1.922,18.988 3.172,18.988
INT_ACC: U2.10 U4.16 | length 15.9
  L1 (Sig) w0.2: U2.10@4.33,16.48 U2.10 4.912,16.488 5.376,16.024 v1(5.376,15.921) ; U4.16 8.584,20.776 8.584,21.157 9.355,21.928 10.278,21.928 10.432,21.774 v1(10.567,21.774)
  L2 (GND) w0.2: v1(5.376,15.921) v1@5.397,15.9
  L4 (Sig) w0.2: v1(5.376,15.921) 6.626,15.921 7.015,16.31 7.781,16.31 7.799,16.328 8.337,16.328 8.355,16.31 10.671,16.31 11.591,17.231 11.591,20.75 v1(10.567,21.774)
INT_GYR_GPIO9: C23.2 R13.1 SW2.34 U2.15 U4.12 | length 33.3
  L1 (Sig) w0.15: U2.15 4.547,18.988 4.597,19.038 4.658,19.038 4.92,19.3 6.267,19.3 6.816,18.751 7.159,18.751 U4.12 7.834,18.676 8.2,19.041 v1(8.2,19.154)
  L1 (Sig) w0.2: v1(5.936,35.599) 5.936,35.724 6.612,36.4 7.3,36.4 7.325,36.425 11.475,36.425 R13.1@11.475,34.554 ; C23.2 SW2.34@7.322,36.422
  L4 (Sig) w0.2: v1(5.936,35.599) 6.01,35.673 6.827,35.673 7.6,34.9 7.6,33.7 9.5,31.8 9.5,19.957 8.708,19.165 8.21,19.165 v1(8.2,19.154)
LED_1: D3.A U2.8 | length 7.9
  L1 (Sig) w0.2: U2.8 3.672,14.828 4.2,14.3 4.2,8.552 4.788,7.965 D3.A
LED_1_K: D3.K R11.2 | length 1.4
  L1 (Sig) w0.2: D3.K 5.794,7.921 7.135,7.921 R11.2
LED_2: D4.A U2.9 | length 6.6
  L1 (Sig) w0.2: U2.9 4.322,14.673 5.351,13.644 5.351,10.626 4.8,10.075 D4.A
LED_3V3_K: D2.K R10.2 | length 1.4
  L1 (Sig) w0.2: D2.K 11.187,32.38 11.187,31.079 R10.2
LED_B_K: D4.K R12.2 | length 1.4
  L1 (Sig) w0.2: D4.K 5.815,10.04 7.127,10.04 R12.2
LNA_IN: C10.2 L2.1 U2.1 | length 3.6
  L1 (Sig) w0.295: C10.2 -1.689,13.028 -0.825,13.028 L2.1 -0.813,13.44 0.172,14.425 U2.1 U2.1@0.179,15.331
MCU_FSPI_CLK: R1.2 U2.12 | length 4.2
  L1 (Sig) w0.15: U2.12 5.091,17.488 ; 5.091,17.489 5.813,17.489 6.471,16.831 6.471,15.403 6.271,15.203 R1.2@6.221,15.203
MCU_UART0_RX: R3.2 U2.27 | length 3.2
  L1 (Sig) w0.2: R3.2@-3.38,19.19 -3.33,19.19 -2.627,18.488 U2.27
MCU_UART0_TX: R6.2 U2.28 | length 5.2
  L1 (Sig) w0.2: R6.2 -5.106,19.209 -3.885,17.988 U2.28
MCU_USB_D_N: D1.3 U2.25 | length 10.3
  L1 (Sig) w0.17: U2.25 -0.518,19.448 -0.823,19.448 -0.838,19.433 -1.223,19.433 -1.323,19.532 -1.323,22.879 -0.374,23.827 -0.374,27.169 -0.274,27.268 -0.154,27.268 0.381,27.803 D1.3
MCU_USB_D_P: D1.1 U2.26 | length 10.9
  L1 (Sig) w0.17: D1.1 -1.519,27.803 -0.984,27.268 -0.864,27.268 -0.764,27.169 -0.764,23.989 -1.713,23.04 -1.713,19.371 -1.385,19.043 -0.838,19.043 -0.823,19.028 -0.518,19.028 U2.26
NetC5_1: C5.1 L1.1 U2.2 U2.3 | length 4.3
  L1 (Sig) w0.2: C5.1 0.422,12.09 0.422,12.671 L1.1 0.703,12.952 0.703,14.375 1.197,14.869 1.197,15.313 U2.3 U2.2
NetC19_2: C19.2 U3.4 | length 1.8
  L1 (Sig) w0.2: C19.2 9.754,25.949 9.954,26.149 U3.4
NetD5_4: D5.4 P1.2 | length 7.2
  L1 (Sig) w0.2: P1.2 -4.809,27.809 -3.287,26.287 D5.4
NetD5_6: D5.6 P1.4 | length 3.4
  L1 (Sig) w0.2: P1.4 -5.709,25.309 -5.187,24.787 D5.6
NetJ1_A5: J1.A5 R9.2 | length 6.9
  L1 (Sig) w0.2: J1.A5 1.25,34.65 2.2,35.6 4.87,35.6 5.53,34.94 5.822,34.94 R9.2@5.968,34.793
NetJ1_B5: J1.B5 R8.2 | length 6.2
  L1 (Sig) w0.2: R8.2 -5.668,34.793 -5.061,35.4 -2.3,35.4 -1.75,34.85 J1.B5
SPI_CLK: U1.6 U2.22 | length 4.1
  L1 (Sig) w0.15: U2.22 1.122,20.188 1.122,20.478 0.3,21.3 0.3,22 0.492,22.192 1.409,22.192 1.497,22.28 U1.6
SPI_DI: U1.5 U2.23 | length 3.9
  L1 (Sig) w0.15: U2.23 0.622,20.188 0.622,20.474 -0.1,21.196 -0.1,22.468 0.299,22.867 U1.5
SPI_DO: U1.2 U2.24 | length 7.2
  L1 (Sig) w0.15: U2.24 0.152,20.138 0.122,20.168 -0.178,20.168 -0.4,20.39 -0.4,23.338 0.829,24.567 1.415,24.567 1.922,25.074 1.922,25.492 U1.2
SPI_NCS: U1.1 U2.21 | length 9
  L1 (Sig) w0.2: v1(1,21.5) 1.657,20.843 1.657,20.153 U2.21 ; U1.1 2.502,25.572 2.502,26.864 v1(2.507,26.868)
  L4 (Sig) w0.2: v1(1,21.5) 1.1,21.5 2.507,22.907 v1(2.507,26.868)
SPI_NHLD: U1.7 U2.19 | length 3
  L1 (Sig) w0.17: U1.7 2.062,22.802 2.062,22.37 2.672,21.76 U2.19
SPI_NWP: U1.3 U2.20 | length 11.1
  L1 (Sig) w0.2: U1.3 v1(1.497,26.903) ; v1(2.037,21.497) 2.037,21.362 2.172,21.227 U2.20
  L2 (GND) w0.2: v1(2.037,21.497) v1@2.037,21.651
  L4 (Sig) w0.2: v1(1.497,26.903) 2.113,27.518 2.782,27.518 3.157,27.143 3.157,26.04 3.15,26.034 3.15,22.61 v1(2.037,21.497)
UART0_RX: D5.3 R3.1 | length 1.4
  L1 (Sig) w0.2: R3.1 D5.3@-3.3,21.581
UART0_TX: D5.1 R6.1 | length 1.4
  L1 (Sig) w0.2: D5.1 -5.156,21.564 R6.1
USB_D_N: D1.4 J1.A7 J1.B7 | length 5.1
  L1 (Sig) w0.17: J1.A7 -0.25,31.835 ; D1.4 0.381,30.703 -0.25,31.334 -0.25,31.835 ; J1.B7 0.75,32.353 0.233,31.835 -0.25,31.835
USB_D_P: D1.6 J1.A6 J1.B6 | length 5.8
  L1 (Sig) w0.17: D1.6 -1.519,30.703 -0.75,31.472 J1.B6 ; J1.B6@-0.762,33.17 -0.685,33.247 -0.685,33.783 -0.475,33.992 -0.025,33.992 0.185,33.783 0.185,32.832 J1.A6@0.255,32.762
XTAL_IN: C13.2 R7.2 X1.1 | length 6.1
  L1 (Sig) w0.2: C13.2 -9.7,17.416 X1.1 -9.683,17.349 -9.033,16.699 -9.033,15.169 -8.714,14.849 -7.753,14.849 -7.376,15.226 -7.376,15.302 R7.2
XTAL_N: C14.2 U2.29 X1.3 | length 9
  L1 (Sig) w0.2: X1.3 -8.218,15.565 -8.218,16.182 -8,16.4 C14.2 -7.058,16.358 -6.567,16.358 -5.437,17.488 U2.29
XTAL_P: R7.1 U2.30 | length 6.3
  L1 (Sig) w0.2: R7.1 -6.176,15.552 -5.976,15.752 -4.74,16.988 U2.30
pads on no net: J1.A8 J1.B8 J1.MH J1.SH U2.4 U2.5 U4.1 U4.13

## Polygon pours and split planes (outlines as drawn)
GND on L1 (Sig) "NONET_L01_P001" (solid, remove dead copper, shelved, pour order 1): 5.5,5 -9.25,5 -11.5,5 cw(c-11.5,6) -12.5,6 -12.5,39 cw(c-11.5,39) -11.5,40 11.5,40 cw(c11.5,39) 12.5,39 12.5,6 cw(c11.5,6) 11.5,5 9.25,5 ccw(c9.249,4.944) 9.248,5
GND on L2 (GND) "GND_L02_P003" (solid, remove dead copper, pour order 3): 5.5,5 -9.25,5 -11.5,5 cw(c-11.5,6) -12.5,6 -12.5,39 cw(c-11.5,39) -11.5,40 11.5,40 cw(c11.5,39) 12.5,39 12.5,6 cw(c11.5,6) 11.5,5 9.25,5 ccw(c9.249,4.944) 9.248,5
GND on L3 (GND) "GND_L03_P004" (solid, remove dead copper, pour order 4): 5.5,5 -9.25,5 -11.5,5 cw(c-11.5,6) -12.5,6 -12.5,39 cw(c-11.5,39) -11.5,40 11.5,40 cw(c11.5,39) 12.5,39 12.5,6 cw(c11.5,6) 11.5,5 9.25,5 ccw(c9.249,4.944) 9.248,5
GND on L4 (Sig) "GND_L04_P005" (solid, remove dead copper, pour order 5): 5.5,5 -9.25,5 -11.5,5 cw(c-11.5,6) -12.5,6 -12.5,39 cw(c-11.5,39) -11.5,40 11.5,40 cw(c11.5,39) 12.5,39 12.5,6 cw(c11.5,6) 11.5,5 9.25,5 ccw(c9.249,4.944) 9.248,5

## Other copper
L1 (Sig):
  pour cut-out: -2.6,11.4 -1.2,11.4 -1.2,9.8 -1.3,9.7 -1.7,9.7 -4.052,7.348 -4.052,5 -5.152,5 -5.2,5.048 -5.2,7.6 -2.6,10.2
  pour cut-out: -10.2,19.6 -7,19.6 -5.735,18.335 -5.735,15.165 -6.4,14.5 -10.8,14.5 -11.4,15.1 -11.4,18.4
  pour cut-out: -2.23,27.47 -1.941,27.759 0.741,27.759 1.147,27.353 1.147,25.693 0.555,25.1 0.06,25.1 0.06,19.063 -0.14,18.863 -1.56,18.863 -2.131,19.427

## Silkscreen, mask and mechanical layers (free items; w line width, h text height)
Board Shape:
  lines w0.2: 11.5,5 ccw(c11.5,6) 12.5,6 12.5,39 ccw(c11.5,39) 11.5,40 -11.5,40 ccw(c-11.5,39) -12.5,39 -12.5,6 ccw(c-11.5,6) -11.5,5 -9.25,5 cw(c-9.25,4) -8.25,4 -8.25,1 ccw(c-7.25,1) -7.25,0 7.25,0 ccw(c7.25,1) 8.25,1 8.25,4 cw(c9.25,4) 9.25,5 11.5,5 ; 11.5,5 ccw(c11.5,5) 11.5,5 ; 11.5,5 11.5,5

## Text inside footprints (layer, text, board x,y; h text height)
D2: Mechanical 13 "+" at 8.767,32.926 h0.5
D3: Mechanical 13 "+" at 3.404,8.423 h0.5
D4: Mechanical 13 "+" at 3.417,10.533 h0.5